# Altium PCB Main.PcbDoc (part 4 of 4)
Units mm, origin at the board's own origin, x right, y up, seen from the top; angles counter-clockwise.
Board outline 172.29 x 85.1 mm, 6 copper layers (Component Side, Ground Plane, Signal Layer 1, Signal Layer 2, Power Plane, Solder Side), stack 1.297 mm thick; 277 components, 256 nets, 1030 pads, 416 vias.
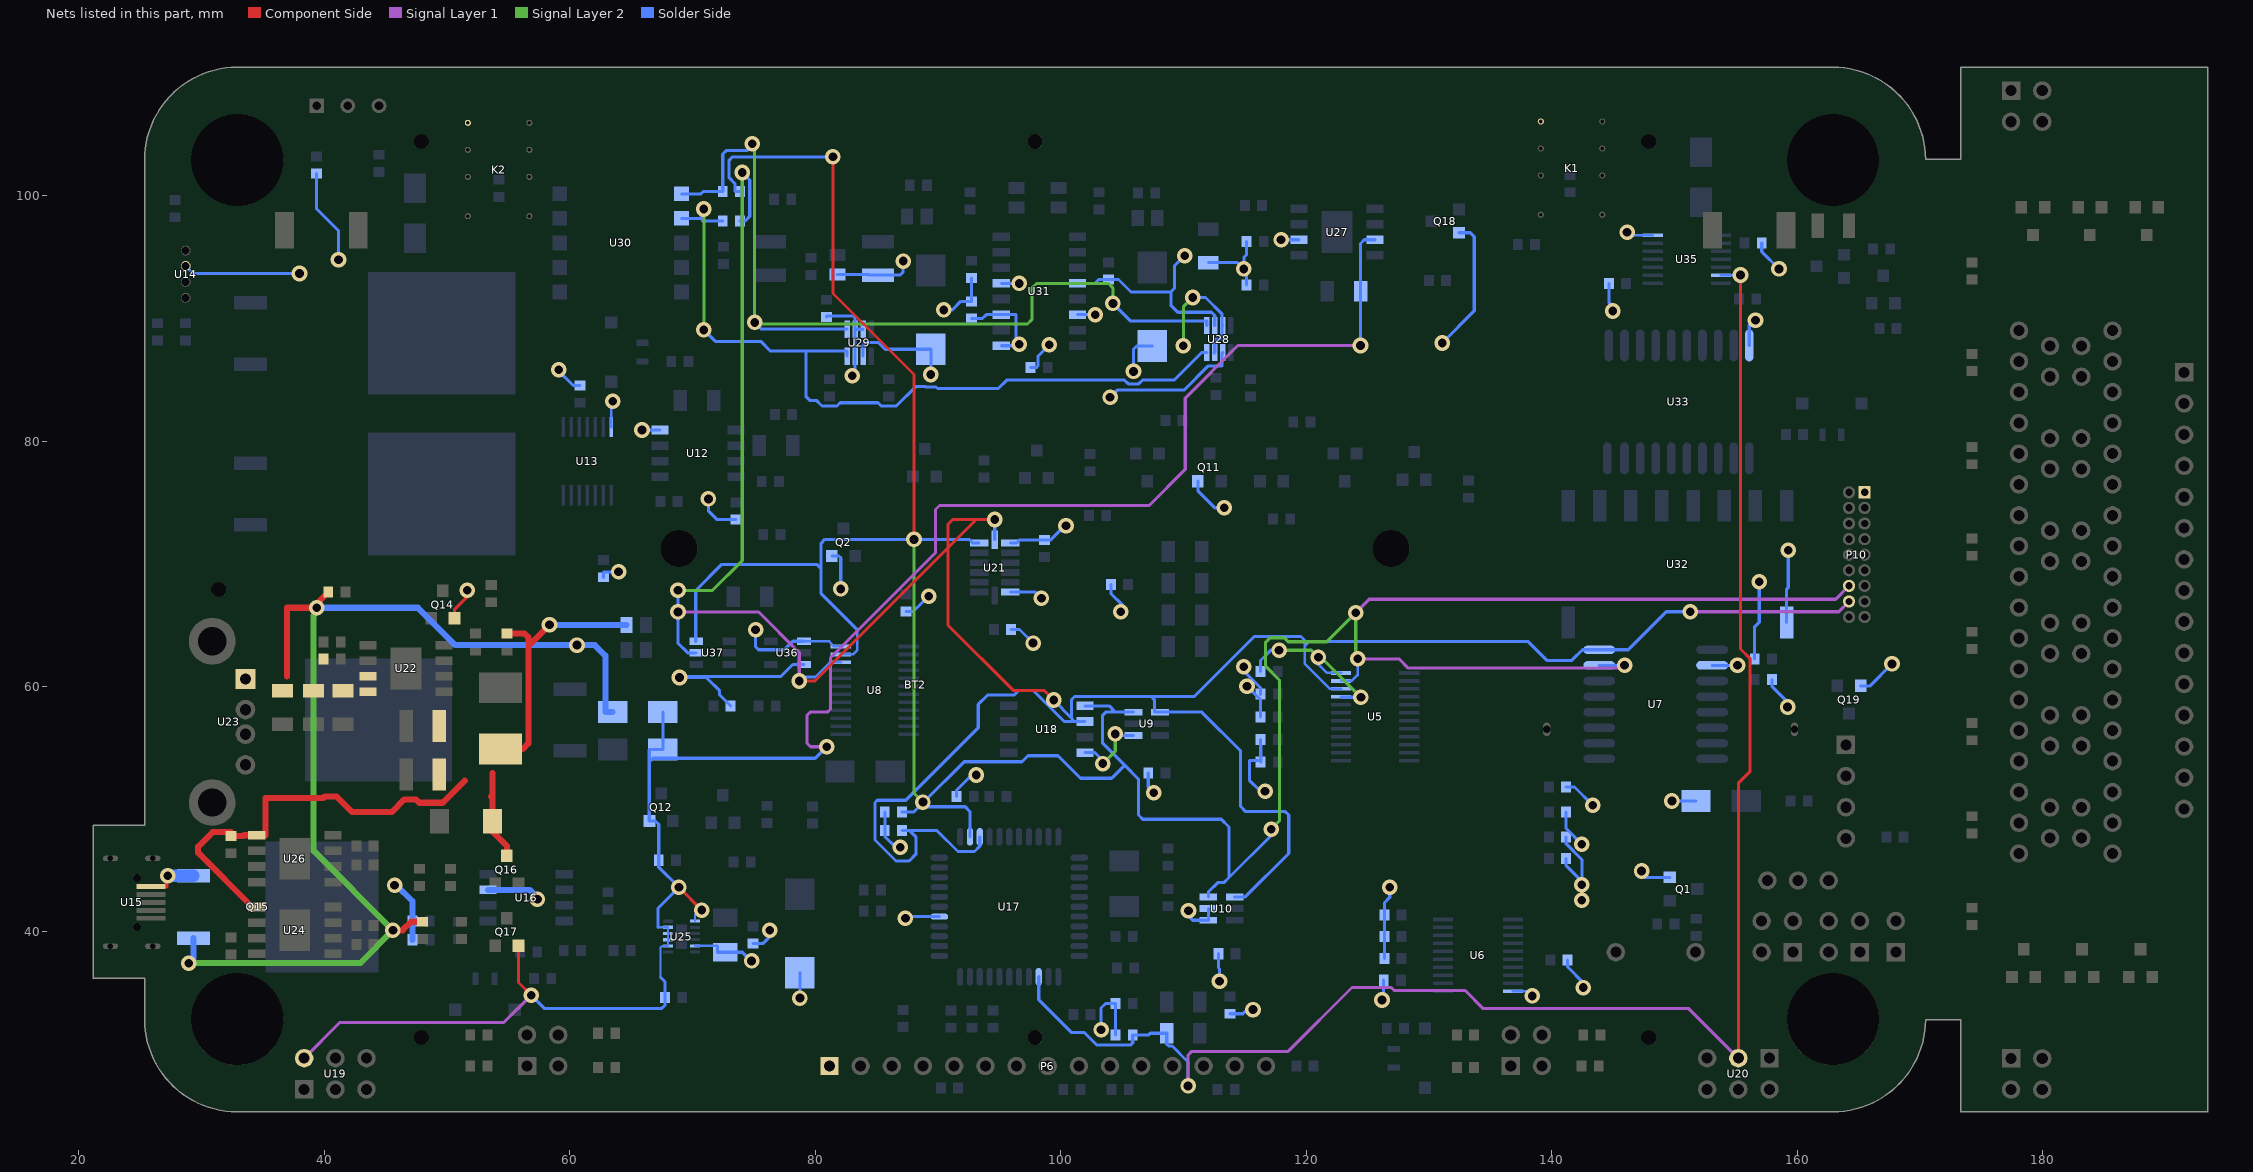
[diagram p8: the nets of this part, all layers, seen from the top]

## Via types
v1: diameter 1.27, hole 0.711, Component Side to Solder Side, tented both sides, 407 vias
v2: diameter 0.66, hole 0.33, Component Side to Solder Side, 8 vias
v3: diameter 1.27, hole 0.711, Component Side to Solder Side, 1 vias

## Nets (pads, with @x,y where several pads share a name; then routed paths per layer and width w, separated by ;. In a path a pad name is that pad's centre, name@x,y a point inside that pad or via, vN(x,y) a via of type N, cw(c..) or ccw(c..) an arc to the next point about the centre after c; other vN are vias at no path point) (continued)
SCL: L5.1 P10.16 R51.1 U5.22 U7.16 U8.22 U9.1 U10.1 U17.3 U18.6 U21.14 U37.5 | length 257.2
  Component Side w0.254: v1(78.689,60.452) 79.948,60.452 90.805,71.309 ; v1(94.615,73.609) 93.106,73.609 ; v1(99.416,58.903) 98.628,59.69 96.114,59.69 90.805,64.999 90.805,71.309 ; 90.805,71.309 93.106,73.609 ; 90.805,71.309 90.805,73.228 91.186,73.609 93.106,73.609
  Signal Layer 1 w0.254: v1(68.809,66.075) 75.377,66.075 78.689,62.763 v1(78.689,60.452) ; v1(151.282,66.091) 163.373,66.091 P10.16@164.211,66.929
  Signal Layer 2 w0.254: v1(68.809,67.832) 71.618,67.832 74.041,70.255 v1(74.041,101.879)
  Solder Side w0.21: 80.01,60.79 81.186,61.965 U8.22@82.061,61.965 ; 119.877,63.298 119.877,61.849 121.92,59.806 U5.22@122.828,59.806
  Solder Side w0.254: v1(68.809,67.832) v1(68.809,66.075) 68.809,63.525 69.596,62.738 U37.5@70.277,62.738 ; L5.1@73.852,97.917 74.27,97.917 74.651,98.298 74.651,101.27 v1(74.041,101.879) ; v1(78.689,60.452) 79.027,60.79 80.01,60.79 ; R51.1@87.06,48.26 87.681,48.26 ; U17.3@93.396,47.752 93.396,46.99 92.966,46.56 91.616,46.56 89.916,48.26 87.681,48.26 ; U21.14@94.615,71.966 v1(94.615,73.609) ; v1(99.416,58.903) 100.863,57.404 ; U18.6@101.958,57.15 101.117,57.15 ; U10.1@114.164,42.86 115.037,42.86 118.567,46.391 118.567,49.53 118.288,49.809 115.062,49.809 114.63,50.241 114.63,54.762 111.481,57.912 U9.1@108.068,57.912 107.62,57.912 107.62,58.928 107.366,59.182 ; v1(151.282,66.091) 149.327,66.091 146.228,62.992 U7.16@143.863,62.992 142.494,62.992 141.63,62.128 139.598,62.128 138.049,63.678 120.257,63.678 119.877,63.298 119.877,63.754 119.56,64.072 115.76,64.072 110.871,59.182 107.366,59.182 ; 87.681,48.26 88.189,47.752 88.189,46.337 87.641,45.789 86.57,45.789 84.861,47.498 84.861,50.546 85.054,50.738 87.371,50.738 93.269,56.636 93.269,58.548 94.033,59.312 96.204,59.312 96.582,59.69 97.728,59.69 100.268,57.15 101.117,57.15 ; 100.863,57.404 101.117,57.15 ; 100.863,57.404 100.863,58.928 101.117,59.182 107.366,59.182
SCL_IN: L5.2 U28.4 U29.4 U30.2 | length 66.1
  Signal Layer 2 w0.254: v1(70.917,89.052) v1(70.917,98.901)
  Solder Side w0.254: U30.2@69.088,98.139 70.612,98.139 ; v1(70.917,89.052) 71.852,88.117 75.551,88.117 76.343,87.325 79.248,87.325 ; v1(70.917,98.901) 70.917,98.444 70.612,98.139 ; L5.2@72.452,97.917 70.859,97.917 70.637,98.139 70.612,98.139 ; U29.4@82.591,86.911 82.591,87.325 79.248,87.325 ; 83.305,83.12 82.034,83.12 81.761,82.847 80.545,82.847 80.08,83.312 79.543,83.312 79.248,83.607 79.248,87.325 ; 83.305,83.12 85.098,83.12 85.371,82.847 86.587,82.847 88.169,84.43 88.958,84.43 88.987,84.4 89.829,84.4 89.952,84.277 94.909,84.277 95.595,84.963 105.188,84.963 105.497,84.654 106.339,84.654 106.648,84.963 109.22,84.963 111.465,87.208 U28.4@111.887,87.208
SDA: L4.1 P10.14 R52.1 U5.23 U7.15 U8.23 U9.6 U10.6 U17.2 U18.5 U21.13 U37.6 | length 266
  Component Side w0.254: v1(81.432,103.149) 81.432,92.024 88.036,85.42 v1(88.036,71.984)
  Signal Layer 1 w0.254: v1(124.028,66.015) 125.12,67.107 163.119,67.107 P10.14@164.211,68.199 ; v1(124.181,62.255) 127.553,62.255 128.315,61.493 145.696,61.493 v1(145.925,61.722)
  Signal Layer 2 w0.254: v1(88.036,71.984) 88.036,51.313 v1(88.766,50.584) ; v1(117.133,48.375) 117.805,49.047 117.805,60.528 116.688,61.646 116.688,63.602 117.054,63.968 118.201,63.968 118.523,63.646 121.66,63.646 v1(124.028,66.015) 124.028,62.408 v1(124.181,62.255)
  Solder Side w0.21: U8.23@82.061,62.615 83.058,62.615 83.417,62.974 83.417,64.614 ; U5.23@122.828,60.456 123.698,60.456 124.181,60.939 v1(124.181,62.255)
  Solder Side w0.254: U37.6@70.277,63.688 70.256,63.688 70.256,67.825 72.383,69.952 80.112,69.952 80.467,69.596 ; L4.1@73.852,100.33 73.444,100.33 73.444,100.978 72.974,101.448 72.974,102.87 73.254,103.149 v1(81.432,103.149) ; 83.417,64.614 80.467,67.564 80.467,69.596 ; R52.1@87.06,49.784 88.036,49.784 v1@88.801,50.549 ; v1(88.766,50.584) v1@88.801,50.549 ; U17.2@92.596,47.752 92.596,49.81 92.202,50.204 88.766,50.204 v1@88.801,50.549 ; U21.13@93.34,71.691 92.812,71.691 92.519,71.984 v1(88.036,71.984) 80.772,71.984 80.467,71.679 80.467,69.596 ; U18.5@101.958,58.42 103.937,58.42 104.445,57.912 ; U9.6@105.918,57.912 104.445,57.912 ; U10.6@112.014,42.86 112.014,43.256 112.776,44.018 113.284,44.018 113.701,44.436 ; v1(117.133,48.375) 117.133,47.867 113.701,44.436 ; U7.15@143.863,61.722 v1(145.925,61.722) ; v1@88.801,50.549 92.126,53.873 96.839,53.873 97.322,54.356 99.771,54.356 101.6,52.527 104.14,52.527 105.194,53.581 ; 104.445,57.912 103.657,57.912 103.403,57.658 103.403,55.372 105.194,53.581 ; 105.194,53.581 106.324,52.451 106.324,49.53 106.666,49.189 113.066,49.189 113.701,48.554 113.701,44.436
SDA_IN: L4.2 U28.5 U29.5 U30.1 | length 73.7
  Signal Layer 2 w0.254: v1(74.854,104.216) 75.057,104.013 v1(75.057,89.662) ; v1@75.184,89.535 97.282,89.535 97.638,89.891 97.638,92.456 98.019,92.837 103.886,92.837 104.242,92.481 v1(104.242,91.211)
  Solder Side w0.254: U30.1@69.088,100.139 70.663,100.139 70.854,100.33 L4.2@72.452,100.33 72.452,103.378 72.731,103.657 74.422,103.657 74.854,104.089 v1(74.854,104.216) ; v1(75.057,89.662) 75.59,89.129 82.591,89.129 U29.5@82.591,89.111 ; v1(104.242,91.211) 105.689,89.764 111.887,89.764 U28.5@111.887,89.408
SET: D12.2 R56.1 U17.25 U20.2 U35.6 | length 137.9
  Component Side w0.254: U20.2@155.194,29.718 155.194,52.121 156.159,53.086 156.159,62.263 155.372,63.05 v1(155.372,93.523)
  Signal Layer 1 w0.254: v1(110.363,27.457) 110.363,29.972 110.668,30.277 118.516,30.277 123.723,35.484 126.906,35.484 127.152,35.238 132.932,35.238 134.413,33.757 151.155,33.757 U20.2@155.194,29.718
  Solder Side w0.21: U35.6@153.778,93.513 155.362,93.513 v1(155.372,93.523)
  Solder Side w0.254: U17.25@98.196,36.352 98.196,34.493 100.888,31.801 101.93,31.801 102.946,30.785 105.664,30.785 105.856,30.977 R56.1@105.856,31.623 107.163,31.623 107.29,31.75 D12.2@108.632,31.75 108.632,30.861 108.784,30.709 109.067,30.709 110.363,29.412 v1(110.363,27.457)
SGND: C35.2 C36.1 R83.2 U28.3 U28.7 U29.3 U29.6 U29.7 U31.9 U31.11 | length 29.5
  Signal Layer 2 w0.254: v1(109.982,87.757) 109.982,90.932 v1(110.744,91.694)
  Solder Side w0.254: R83.2@80.899,90.105 80.899,90.195 83.089,90.195 83.241,90.043 U29.6@83.241,89.111 U29.6@83.241,89.103 ; v1(83.007,85.319) 83.007,85.644 83.241,85.877 U29.3@83.241,86.911 83.241,88.646 U29.6@83.241,89.103 ; U29.7@83.891,89.111 83.891,89.103 U29.6@83.241,89.103 ; C35.2@92.71,89.978 93.61,89.978 93.929,90.297 U31.11@95.15,90.297 96.358,90.297 96.358,88.138 v1(96.612,87.884) 96.485,87.757 U31.9@95.15,87.757 ; C36.1@97.533,85.979 98.009,85.979 98.136,86.106 98.136,86.92 v1(99.06,87.844) ; v1(110.744,91.694) 111.783,91.694 113.143,90.334 113.143,89.452 U28.7@113.187,89.408 113.143,89.364 113.143,88.327 112.711,88.327 112.537,88.153 U28.3@112.537,87.208 U28.3@112.493,87.164
VCC_5V: C12.2 C39.2 C40.2 D14.1 K1.3 K2.3 Q15.2 R65.2 R68.2 R72.2 U22.7 U22.8 U23.1 | length 91.7
  Component Side w0.49: U22.8@43.536,59.563 U22.8@43.557,59.563 ; U22.7@43.536,60.833 U22.7@43.557,60.833
  Component Side w0.5: 36.957,60.833 36.957,66.421 v1(39.37,66.421) 39.37,66.74 R68.2@40.321,67.691 ; v1(45.586,40.132) 46.359,40.132 47.059,40.832 R72.2@48.006,40.832
  Signal Layer 2 w0.5: v1(28.956,37.465) 42.919,37.465 v1(45.586,40.132) 39.116,46.602 39.116,65.786 39.37,66.04 v1(39.37,66.421)
  Solder Side w0.5: v1(28.956,37.465) 29.345,37.854 Q15.2@29.345,39.497 ; v1(39.37,66.421) 47.625,66.421 50.673,63.373 v1(60.579,63.373) 62.027,63.373 62.89,62.509 62.89,57.912 D14.1@63.482,57.912
VCC_BAT: BT2.1 C13.2 C15.2 C41.2 L1.1 Q16.1 R64.2 R80.2 U24.5 U26.5 | length 63.6
  Component Side w0.49: 29.718,46.457 34.138,42.037 U24.5@34.495,42.037 ; U26.5@34.495,47.879 35.204,47.879 35.204,49.784
  Component Side w0.5: 29.718,46.457 29.718,46.965 30.886,48.133 32.385,48.133 C15.2@32.385,47.817 33.401,47.817 33.463,47.879 U26.5@34.495,47.879 ; 35.204,49.784 35.204,50.927 39.918,50.927 40.041,51.05 40.985,51.05 42.247,49.788 45.51,49.788 46.518,50.796 47.462,50.796 47.732,50.526 49.637,50.526 51.435,52.324 ; 53.581,51.05 53.704,50.927 ; 53.704,52.942 53.704,50.927 ; L1.1@54.356,54.904 56.149,54.904 56.617,55.372 56.617,63.297 ; Q16.1@54.864,46.21 54.864,47.015 53.704,48.175 BT2.1@53.704,49.022 53.704,50.927 ; R64.2@54.864,64.327 56.298,64.327 56.617,64.008 56.617,63.297 ; v1(58.344,65.024) 56.617,63.297
  Solder Side w0.5: v1(58.344,65.024) R80.2@64.605,65.024
VCC_IN: C16.2 C21.2 D13.2 D14.2 Q12.3 Q17.3 R54.2 U19.6 U25.1 U25.8 U25.9 U25.10 U25.11 U27.3 | length 167.7
  Component Side w0.254: Q17.3@55.814,38.88 55.814,35.88 v1(56.845,34.849) ; v1(68.885,43.637) v1(70.739,41.783)
  Signal Layer 1 w0.254: U19.6@38.354,29.718 41.275,32.639 54.635,32.639 v1(56.845,34.849) ; v1(80.924,55.093) 79.604,55.093 79.324,55.372 79.324,57.658 79.578,57.912 80.975,57.912 81.229,58.166 81.229,62.332 89.789,70.891 89.789,74.422 90.119,74.752 107.188,74.752 110.134,77.699 110.134,83.496 114.421,87.782 v1(124.409,87.782)
  Solder Side w0.175: 67.183,40.386 U25.11@67.988,40.386 U25.8@67.988,38.862 67.513,38.862 67.386,38.735 67.386,36.322 ; U25.1@70.188,40.894 70.18,40.894 70.18,41.402 v1@70.536,41.758
  Solder Side w0.254: v1(56.845,34.849) 57.912,33.782 67.499,33.782 67.753,34.036 C16.2@67.753,34.671 67.753,35.955 67.386,36.322 ; 67.183,40.386 67.183,41.935 v1(68.885,43.637) 67.245,45.277 R54.2@67.245,45.847 67.245,48.768 66.973,49.04 Q12.3@66.487,49.04 ; D14.2@67.582,57.912 D13.2@67.582,54.864 66.472,54.864 66.472,49.04 Q12.3@66.487,49.04 ; v1@70.536,41.758 70.739,41.758 v1(70.739,41.783) ; v1(80.924,55.093) 79.985,54.153 66.792,54.153 66.487,53.848 Q12.3@66.487,49.04 ; v1(124.409,87.782) 124.413,87.786 C21.2@124.413,92.202 124.413,96.092 124.714,96.393 U27.3@125.603,96.393
VCC_MCU: C8.2 C11.2 C17.1 C18.2 D5.1 L2.2 P6.1 P10.1 Q1.3 Q2.3 Q11.3 Q14.3 Q18.3 Q19.3 R7.2 R8.2 R9.2 R10.2 R11.2 R12.2 R13.1 R14.1 R15.1 R16.1 R18.2 R19.2 R20.2 R21.2 R35.2 R37.2 R38.2 R39.2 R51.2 R52.2 R55.2 R56.2 R57.1 R61.2 R62.2 R87.2 R88.2 R89.2 R113.2 R114.2 R115.2 R116.2 R117.2 U5.21 U5.24 U6.20 U7.2 U8.24 U9.4 U10.4 U10.5 U12.8 U13.14 U14.2 U17.38 U18.8 U21.1 U21.6 U25.5 U32.9 U33.20 U35.14 U36.1 U36.3 | length 219.5
  Component Side w0.254: Q14.3@50.607,65.55 50.607,66.295 51.638,67.326 v1(51.638,67.846)
  Signal Layer 1 w0.254: v1(120.987,62.376) v1@121.059,62.304
  Signal Layer 2 w0.254: v1(103.42,53.721) 104.431,54.732 v1(104.431,56.139) ; v1(117.78,62.952) 120.411,62.952 v1(120.987,62.376) 121.195,62.376 v1(124.446,59.125) 124.238,59.125 v1@124.207,59.156
  Solder Side w0.175: U25.5@70.188,38.874 L2.2@72.034,38.874
  Solder Side w0.21: U13.14@63.362,81.134 v1@63.362,83.155 ; U36.1@79.075,63.688 81.111,63.688 81.534,63.265 U8.24@82.061,63.265 ; v1(120.987,62.376) 120.987,61.785 121.666,61.106 U5.24@122.828,61.106 ; U6.20@136.835,35.175 138.143,35.175 v1@138.524,34.794 ; v1@146.271,96.763 U35.14@148.228,96.763
  Solder Side w0.254: U14.2@28.702,94.264 29.316,93.65 v1(37.973,93.65) ; R35.2@39.37,101.789 39.37,98.908 41.148,97.13 v1(41.148,94.767) ; v1(59.095,85.801) 58.982,85.801 60.263,84.52 R38.2@60.833,84.52 ; R37.2@62.738,68.896 62.738,69.342 v1(63.968,69.342) ; v1@63.362,83.155 63.436,83.229 v1(63.489,83.229) ; v1(65.875,80.899) U12.8@67.337,80.899 ; v1(71.287,75.286) 71.287,74.313 72.005,73.595 R39.2@73.533,73.595 ; L2.2@72.034,38.874 72.034,38.351 L2.2@72.644,38.351 74.05,38.351 74.758,37.643 v1(74.805,37.643) ; R89.2@73.09,58.42 72.198,59.312 72.198,59.646 71.113,60.731 v1(68.931,60.731) 69.015,60.815 77.193,60.815 78.166,61.788 U36.3@79.075,61.788 ; C18.2@74.93,39.051 75.714,39.051 76.287,39.624 v1(76.287,40.132) ; v1(75.128,64.618) 75.128,63.246 75.382,62.992 77.469,62.992 78.165,63.688 U36.1@79.075,63.688 ; v1(78.74,34.616) C17.1@78.74,36.678 ; Q2.3@81.346,70.63 81.922,70.63 82.067,70.485 v1(82.067,67.953) ; R52.2@85.66,49.784 R51.2@85.66,48.26 85.66,47.781 86.538,46.903 v1(86.919,46.903) ; v1(87.339,41.125) 87.72,41.125 87.847,41.252 U17.38@90.096,41.252 ; R61.2@87.376,66.102 87.957,66.102 89.216,67.361 v1(89.241,67.361) ; C8.2@91.502,51.054 91.502,51.559 92.735,52.792 v1(93.116,52.792) ; U21.6@95.89,67.691 97.91,67.691 v1(98.418,67.183) ; U21.1@95.89,71.691 96.393,71.691 96.649,71.947 C11.2@98.679,71.947 99.176,71.947 100.33,73.101 v1(100.417,73.101) ; R62.2@95.95,64.643 96.636,64.643 v1(97.739,63.54) ; U18.8@101.958,54.61 102.785,54.61 103.42,53.975 v1(103.42,53.721) ; v1(103.276,32.044) 103.276,33.807 103.632,34.163 R57.1@104.456,34.163 104.456,32.824 R56.2@104.456,31.623 ; R11.2@104.075,68.326 104.075,67.58 105.004,66.652 105.004,66.207 v1(104.877,66.08) ; v1(104.431,56.139) 104.431,56.102 104.521,56.012 U9.4@105.918,56.012 ; R20.2@107.123,52.959 107.123,51.794 v1(107.569,51.348) ; v1(110.4,41.722) 110.4,41.304 110.744,40.96 U10.4@112.014,40.96 U10.5@112.014,41.91 ; Q11.3@111.161,76.726 111.161,75.944 112.547,74.557 v1(113.309,74.557) ; R21.2@112.838,38.227 112.838,37.062 112.928,36.972 v1(112.928,35.981) ; R55.2@113.792,33.336 114.83,33.336 115.174,33.68 v1(115.657,33.68) ; v1(114.91,61.619) 114.91,61.261 116.267,59.904 R114.2@116.267,59.372 ; v1(115.164,60.031) 116.267,58.928 R115.2@116.267,57.531 ; R117.2@116.267,53.848 116.281,53.848 R117.2@116.281,53.972 ; R113.2@116.267,61.214 116.267,62.114 117.105,62.952 v1(117.78,62.952) ; v1(116.637,51.462) 116.267,51.462 115.359,52.37 115.359,53.972 R117.2@116.281,53.972 ; U5.21@122.828,59.156 122.859,59.125 v1(124.446,59.125) ; v1(126.162,34.457) 126.3,34.595 R13.1@126.3,36.068 ; R14.1@126.362,37.846 R7.2@126.362,39.624 R16.1@126.362,41.402 126.362,42.395 126.797,42.83 v1(126.797,43.648) ; v1(131.064,87.986) 133.68,90.602 133.68,96.637 133.35,96.967 Q18.3@132.443,96.967 ; v1(138.397,34.794) v1@138.524,34.794 ; R9.2@141.162,45.974 141.162,45.404 v1@142.443,44.123 ; R15.1@141.162,47.752 141.162,47.182 142.443,45.901 v1@142.443,44.123 ; R8.2@141.162,49.784 141.162,48.438 v1(142.443,47.157) ; R10.2@141.162,51.816 141.848,51.816 v1(143.332,50.332) ; R12.2@141.289,37.719 141.289,37.149 142.57,35.868 v1(142.57,35.473) ; v1(142.443,42.585) v1@142.443,44.123 ; v1(142.443,43.855) v1@142.443,44.123 ; R87.2@144.65,92.837 144.65,91.309 145.368,90.591 v1(144.958,90.591) ; v1(146.133,97.017) 146.133,96.901 v1@146.271,96.763 ; v1(147.31,44.973) 147.31,44.704 147.564,44.45 Q1.3@149.606,44.45 ; v1(149.785,50.673) D5.1@151.747,50.673 ; U7.2@153.063,61.722 v1(155.125,61.722) ; U33.20@156.083,87.785 156.083,89.466 156.464,89.847 v1(156.591,89.847) ; R19.2@156.526,62.23 156.526,64.868 156.896,65.238 v1(156.896,68.54) ; R88.2@157.102,96.139 157.102,95.428 v1(158.51,94.02) ; R18.2@157.926,60.579 157.926,60.009 159.207,58.728 v1(159.207,58.333) ; U32.9@159.131,65.227 159.131,67.924 159.258,68.051 v1(159.258,71.099) ; Q19.3@165.161,60.053 165.928,60.053 v1(167.716,61.841) ; R117.2@116.281,53.972 116.281,54.889 ; 116.281,54.889 116.267,54.904 R116.2@116.267,55.689 116.281,54.889
VCC_RADIO: C20.2 C22.2 C27.2 C31.1 C32.1 C33.1 C34.1 C35.1 L7.1 R47.2 U27.6 U28.2 U28.6 U29.2 U31.4 U31.6 U31.13 | length 63
  Solder Side w0.254: L7.1@81.788,93.561 84.328,93.561 84.328,93.519 C27.2@85.09,93.519 86.898,93.519 87.152,93.773 v1(87.152,94.662) ; U29.2@83.891,86.911 83.891,87.884 84.018,88.011 85.166,88.011 85.699,87.478 C31.1@89.408,87.478 v1(89.408,85.416) ; v1(90.464,90.678) 91.15,90.678 91.85,91.378 C35.1@92.71,91.378 C32.1@92.71,93.28 ; U31.13@95.15,92.837 v1(96.612,92.837) ; U31.6@101.35,90.297 v1(102.812,90.297) ; U31.4@101.35,92.837 102.768,92.837 103.084,93.153 C34.1@103.886,93.153 104.695,93.153 105.711,92.137 108.966,92.137 ; v1(104.013,83.566) 104.593,84.146 110.033,84.146 112.014,86.127 113.143,86.127 113.143,87.164 U28.2@113.187,87.208 ; v1(105.918,85.67) 105.918,87.478 106.172,87.732 C33.1@107.442,87.732 ; v1(110.095,95.098) 109.253,94.256 109.253,92.424 108.966,92.137 ; C22.2@112.014,94.535 114.394,94.535 v1(114.91,94.02) ; U28.6@112.537,89.408 112.537,90.222 112.27,90.489 109.536,90.489 108.966,91.059 108.966,92.137 ; C20.2@115.124,92.71 115.124,93.806 v1(114.91,94.02) ; R47.2@115.124,96.266 115.124,95.163 114.91,94.949 v1(114.91,94.02) ; v1(117.941,96.393) U27.6@119.403,96.393
VCC_USB: C5.2 C7.2 Q15.3 U15.1 U16.7 | length 12.6
  Component Side w0.3: 27.132,43.688 v1@27.132,44.476
  Component Side w0.5: v1@27.132,44.476 v1(27.233,44.577)
  Solder Side w0.49: U16.7@53.34,43.434 56.721,43.434
  Solder Side w0.5: v1(45.72,43.815) 45.873,43.815 47.179,42.509 C5.2@47.179,40.894 C7.2@47.179,39.37 ; 56.721,43.434 57.356,42.799 v1(57.356,42.672)
  Solder Side w1: v1(27.233,44.577) Q15.3@29.345,44.577
pads on no net: BT2.0 P10.17 R31.3 R32.3 S1.1 U1.0 U2.0 U3.0 U4.0 U6.12 U7.4 U8.1 U15.0 U15.4 U17.26 U17.27 U17.29 U19.3 U19.4 U20.3 U20.4 U20.5 U20.6 U21.3 U21.9 U21.10 U21.11 U25.6 U25.7 U26.6 U26.7 U27.1 U27.4 U27.5 U30.4 U30.9 U33.10 U33.11 U36.4
copper on no net:
  other v3: 46.736,69.596

## Polygon pours and split planes (outlines as drawn)
GND on Signal Layer 1 "Sig1-GND" (solid, pour order 4): 25.35,32.9 25.35,36.224 21.209,36.224 cw(c21.209,36.274) 21.159,36.274 21.159,48.641 cw(c21.209,48.641) 21.209,48.691 25.35,48.691 25.35,102.9 cw(c32.9,102.9) 32.9,110.45 162.9,110.45 cw(c162.9,102.9) 170.45,102.95 173.305,102.95 173.305,110.4 cw(c173.355,110.4) 173.355,110.45 193.4,110.45 cw(c193.4,110.4) 193.45,110.4 193.45,25.4 cw(c193.4,25.4) 193.4,25.35 173.355,25.35 cw(c173.355,25.4) 173.305,25.4 173.305,32.85 170.45,32.85 cw(c162.9,32.9) 162.9,25.35 32.9,25.35 cw(c32.9,32.9)
GND on Signal Layer 2 "Sig2-GND" (solid, pour order 5): 25.35,32.9 25.35,36.224 21.209,36.224 cw(c21.209,36.274) 21.159,36.274 21.159,48.641 cw(c21.209,48.641) 21.209,48.691 25.35,48.691 25.35,102.9 cw(c32.9,102.9) 32.9,110.45 162.9,110.45 cw(c162.9,102.9) 170.45,102.95 173.305,102.95 173.305,110.4 cw(c173.355,110.4) 173.355,110.45 193.4,110.45 cw(c193.4,110.4) 193.45,110.4 193.45,25.4 cw(c193.4,25.4) 193.4,25.35 173.355,25.35 cw(c173.355,25.4) 173.305,25.4 173.305,32.85 170.45,32.85 cw(c162.9,32.9) 162.9,25.35 32.9,25.35 cw(c32.9,32.9)
GND on Ground Plane (split plane): 172.794,102.247 172.533,102.358 172.532,102.359 172.531,102.359 172.484,102.374 172.438,102.388 172.436,102.388 172.435,102.389 172.183,102.44 172.794,102.44
GND on Ground Plane (split plane): 172.794,86.224 172.534,86.335 172.533,86.336 172.532,86.336 172.485,86.351 172.439,86.365 172.437,86.365 172.436,86.366 172.135,86.427 172.133,86.427 172.132,86.428 172.084,86.433 172.035,86.438 172.034,86.438 172.033,86.438 171.725,86.438 171.724,86.438 171.723,86.438 171.674,86.433 171.625,86.428 171.624,86.428 171.623,86.428 171.321,86.367 171.32,86.366 171.319,86.366 171.272,86.352 171.226,86.337 171.225,86.337 171.224,86.336 170.961,86.225 170.961,87.528 171.224,87.417 171.225,87.416 171.226,87.416 171.272,87.401 171.319,87.387 171.32,87.387 171.321,87.386 171.623,87.325 171.624,87.325 171.625,87.325 171.674,87.32 171.723,87.315 171.724,87.315 171.725,87.315 172.033,87.315 172.034,87.315 172.035,87.315 172.084,87.32 172.132,87.325 172.133,87.326 172.135,87.326 172.436,87.387 172.437,87.388 172.439,87.388 172.485,87.402 172.532,87.417 172.533,87.417 172.534,87.418 172.794,87.529
GND on Ground Plane (split plane): 171.32,102.389 171.319,102.388 171.317,102.388 171.271,102.374 171.224,102.359 171.223,102.359 171.222,102.358 170.961,102.247 170.961,102.44 171.572,102.44
GND on Ground Plane (split plane): 192.94,25.86 173.815,25.86 173.815,32.578 173.83,32.596 173.872,32.674 173.877,32.684 173.891,32.729 173.906,32.78 173.907,32.791 173.916,32.879 173.916,32.9 173.916,102.9 173.916,102.921 173.906,103.02 173.877,103.116 173.83,103.204 173.815,103.222 173.815,109.94 192.94,109.94
GND on Ground Plane (split plane): 172.794,49.7 172.564,49.805 172.56,49.807 172.556,49.809 172.512,49.823 172.469,49.838 172.465,49.839 172.46,49.84 172.148,49.908 172.143,49.909 172.139,49.91 172.094,49.915 172.049,49.92 172.044,49.92 172.039,49.92 171.719,49.921 171.715,49.92 171.71,49.921 171.665,49.915 171.62,49.911 171.615,49.91 171.611,49.909 171.298,49.841 171.294,49.84 171.289,49.839 171.246,49.825 171.203,49.811 171.199,49.809 171.194,49.807 170.961,49.701 170.961,51.1 171.194,50.994 171.199,50.992 171.203,50.99 171.246,50.976 171.289,50.962 171.294,50.961 171.298,50.96 171.611,50.892 171.615,50.891 171.62,50.89 171.665,50.886 171.71,50.88 171.715,50.881 171.719,50.88 172.039,50.881 172.044,50.881 172.049,50.881 172.094,50.886 172.139,50.891 172.143,50.892 172.148,50.893 172.46,50.961 172.465,50.962 172.469,50.963 172.512,50.978 172.556,50.992 172.56,50.994 172.564,50.996 172.794,51.101
GND on Ground Plane (split plane): 172.794,67.2 172.564,67.306 172.559,67.307 172.555,67.31 172.512,67.324 172.469,67.338 172.465,67.339 172.46,67.34 172.148,67.409 172.143,67.409 172.139,67.411 172.094,67.415 172.048,67.421 172.044,67.42 172.039,67.421 171.719,67.421 171.715,67.421 171.71,67.421 171.665,67.416 171.62,67.411 171.615,67.41 171.611,67.409 171.298,67.342 171.294,67.34 171.289,67.34 171.246,67.325 171.203,67.311 171.199,67.309 171.195,67.308 170.961,67.201 170.961,68.599 171.194,68.493 171.199,68.491 171.203,68.489 171.246,68.475 171.289,68.461 171.294,68.46 171.298,68.459 171.611,68.391 171.615,68.39 171.62,68.389 171.665,68.385 171.71,68.379 171.715,68.38 171.719,68.379 172.039,68.38 172.044,68.38 172.049,68.38 172.094,68.385 172.139,68.39 172.143,68.391 172.148,68.392 172.46,68.46 172.465,68.461 172.469,68.462 172.512,68.477 172.556,68.491 172.56,68.493 172.564,68.495 172.794,68.6
no net on Ground Plane (split plane): 162.771,107.537 162.771,109.94
PGND on Ground Plane (split plane): 137.793,95.504 137.793,91.621 137.106,90.934 58.093,90.934 58.041,90.986 58.041,94.937 58.074,94.904 58.116,94.876 58.166,94.867 58.216,94.876 58.258,94.904 58.286,94.946 58.295,94.996 58.286,95.046 58.258,95.088 58.041,95.304 58.041,101.598 137.793,101.598
SGND on Ground Plane (split plane): 115.568,83.493 114.627,82.552 80.445,82.552 79.885,83.112 79.885,90.676 115.568,90.676
GND on Ground Plane (split plane): 183 vertices, not listed, extent 25.775,25.86 169.938,109.94
GND on Ground Plane (split plane): 172.794,33.36 170.961,33.36 170.961,33.579 170.962,33.578 170.968,33.575 170.973,33.572 171.013,33.554 171.052,33.536 171.059,33.535 171.065,33.532 171.38,33.431 171.387,33.429 171.393,33.427 171.435,33.419 171.478,33.41 171.484,33.41 171.491,33.408 171.821,33.379 171.827,33.379 171.834,33.378 171.877,33.38 171.921,33.38 171.927,33.382 171.934,33.382 172.262,33.426 172.268,33.428 172.275,33.428 172.317,33.439 172.359,33.449 172.365,33.452 172.371,33.454 172.681,33.569 172.687,33.572 172.694,33.574 172.732,33.594 172.771,33.613 172.777,33.617 172.782,33.62 172.794,33.628
POWER_GND on Ground Plane (split plane): 49.796,107.3 49.806,107.251 49.834,107.209 49.876,107.18 49.926,107.171 150.874,107.171 150.874,103.94 150.784,103.851 150.756,103.809 150.747,103.759 150.756,103.709 150.784,103.667 150.826,103.639 150.874,103.63 150.874,102.289 150.441,101.856 33.782,101.856 33.732,101.847 33.69,101.819 31.023,99.152 30.995,99.11 30.986,99.06 30.986,67.183 30.995,67.133 31.023,67.091 31.065,67.063 31.115,67.054 60.525,67.054 61.085,66.494 61.085,65.024 61.085,48.768 61.085,48.46 61.085,41.964 60.779,41.658 51.435,41.658 51.385,41.649 51.343,41.621 50.581,40.859 50.553,40.817 50.544,40.767 50.544,37.011 50.296,36.764 24.798,36.764 24.749,36.754 24.719,36.734 21.669,36.734 21.669,48.181 25.35,48.181 25.449,48.191 25.545,48.22 25.633,48.267 25.711,48.33 25.774,48.408 25.821,48.496 25.85,48.592 25.86,48.691 25.86,102.9 25.86,103.246 25.928,103.934 26.063,104.613 26.264,105.275 26.528,105.914 26.854,106.524 27.239,107.099 27.677,107.633 28.167,108.123 28.701,108.561 29.276,108.946 29.886,109.272 30.525,109.536 31.187,109.737 31.866,109.872 32.554,109.94 49.796,109.94
no net on Power Plane (split plane): 172.794,102.247 172.533,102.358 172.532,102.359 172.531,102.359 172.484,102.374 172.438,102.388 172.436,102.388 172.435,102.389 172.183,102.44 172.794,102.44
no net on Power Plane (split plane): 172.794,67.2 172.564,67.306 172.559,67.307 172.555,67.31 172.512,67.324 172.469,67.338 172.465,67.339 172.46,67.34 172.148,67.409 172.143,67.409 172.139,67.411 172.094,67.415 172.048,67.421 172.044,67.42 172.039,67.421 171.719,67.421 171.715,67.421 171.71,67.421 171.665,67.416 171.62,67.411 171.615,67.41 171.611,67.409 171.298,67.342 171.294,67.34 171.289,67.34 171.246,67.325 171.203,67.311 171.199,67.309 171.195,67.308 170.961,67.201 170.961,68.599 171.194,68.493 171.199,68.491 171.203,68.489 171.246,68.475 171.289,68.461 171.294,68.46 171.298,68.459 171.611,68.391 171.615,68.39 171.62,68.389 171.665,68.385 171.71,68.379 171.715,68.38 171.719,68.379 172.039,68.38 172.044,68.38 172.049,68.38 172.094,68.385 172.139,68.39 172.143,68.391 172.148,68.392 172.46,68.46 172.465,68.461 172.469,68.462 172.512,68.477 172.556,68.491 172.56,68.493 172.564,68.495 172.794,68.6
no net on Power Plane (split plane): 171.32,102.389 171.319,102.388 171.317,102.388 171.271,102.374 171.224,102.359 171.223,102.359 171.222,102.358 170.961,102.247 170.961,102.44 171.572,102.44
no net on Power Plane (split plane): 192.94,25.86 173.815,25.86 173.815,32.578 173.83,32.596 173.872,32.674 173.877,32.684 173.891,32.729 173.906,32.78 173.907,32.791 173.916,32.879 173.916,32.9 173.916,102.9 173.916,102.921 173.906,103.02 173.877,103.116 173.83,103.204 173.815,103.222 173.815,109.94 192.94,109.94
no net on Power Plane (split plane): 172.794,33.36 170.961,33.36 170.961,33.579 170.962,33.578 170.968,33.575 170.973,33.572 171.013,33.554 171.052,33.536 171.059,33.535 171.065,33.532 171.38,33.431 171.387,33.429 171.393,33.427 171.435,33.419 171.478,33.41 171.484,33.41 171.491,33.408 171.821,33.379 171.827,33.379 171.834,33.378 171.877,33.38 171.921,33.38 171.927,33.382 171.934,33.382 172.262,33.426 172.268,33.428 172.275,33.428 172.317,33.439 172.359,33.449 172.365,33.452 172.371,33.454 172.681,33.569 172.687,33.572 172.694,33.574 172.732,33.594 172.771,33.613 172.777,33.617 172.782,33.62 172.794,33.628
no net on Power Plane (split plane): 172.794,49.7 172.564,49.805 172.56,49.807 172.556,49.809 172.512,49.823 172.469,49.838 172.465,49.839 172.46,49.84 172.148,49.908 172.143,49.909 172.139,49.91 172.094,49.915 172.049,49.92 172.044,49.92 172.039,49.92 171.719,49.921 171.715,49.92 171.71,49.921 171.665,49.915 171.62,49.911 171.615,49.91 171.611,49.909 171.298,49.841 171.294,49.84 171.289,49.839 171.246,49.825 171.203,49.811 171.199,49.809 171.194,49.807 170.961,49.701 170.961,51.1 171.194,50.994 171.199,50.992 171.203,50.99 171.246,50.976 171.289,50.962 171.294,50.961 171.298,50.96 171.611,50.892 171.615,50.891 171.62,50.89 171.665,50.886 171.71,50.88 171.715,50.881 171.719,50.88 172.039,50.881 172.044,50.881 172.049,50.881 172.094,50.886 172.139,50.891 172.143,50.892 172.148,50.893 172.46,50.961 172.465,50.962 172.469,50.963 172.512,50.978 172.556,50.992 172.56,50.994 172.564,50.996 172.794,51.101
VCC_5V on Power Plane (split plane): 49.911,107.315 150.874,107.315 150.874,104.194 148.409,101.729 33.836,101.729 33.809,101.724 33.782,101.729 33.732,101.72 33.69,101.692 30.896,98.898 30.868,98.856 30.859,98.806 30.859,97.282 30.859,97.028 30.859,77.47 30.859,67.31 30.868,67.26 30.896,67.218 30.938,67.19 30.988,67.181 38.046,67.181 38.262,66.964 38.304,66.936 38.354,66.927 60.652,66.927 61.212,66.367 61.212,62.486 38.229,62.486 38.229,65.786 38.22,65.836 38.192,65.878 38.15,65.906 38.1,65.915 25.86,65.915 25.86,102.9 25.86,103.246 25.928,103.934 26.063,104.613 26.264,105.275 26.528,105.914 26.854,106.524 27.239,107.099 27.677,107.633 28.167,108.123 28.701,108.561 29.276,108.946 29.886,109.272 30.525,109.536 31.187,109.737 31.866,109.872 32.554,109.94 49.911,109.94
no net on Power Plane (split plane): 172.794,86.224 172.534,86.335 172.533,86.336 172.532,86.336 172.485,86.351 172.439,86.365 172.437,86.365 172.436,86.366 172.135,86.427 172.133,86.427 172.132,86.428 172.084,86.433 172.035,86.438 172.034,86.438 172.033,86.438 171.725,86.438 171.724,86.438 171.723,86.438 171.674,86.433 171.625,86.428 171.624,86.428 171.623,86.428 171.321,86.367 171.32,86.366 171.319,86.366 171.272,86.352 171.226,86.337 171.225,86.337 171.224,86.336 170.961,86.225 170.961,87.528 171.224,87.417 171.225,87.416 171.226,87.416 171.272,87.401 171.319,87.387 171.32,87.387 171.321,87.386 171.623,87.325 171.624,87.325 171.625,87.325 171.674,87.32 171.723,87.315 171.724,87.315 171.725,87.315 172.033,87.315 172.034,87.315 172.035,87.315 172.084,87.32 172.132,87.325 172.133,87.326 172.135,87.326 172.436,87.387 172.437,87.388 172.439,87.388 172.485,87.402 172.532,87.417 172.533,87.417 172.534,87.418 172.794,87.529
VCC_RADIO on Power Plane (split plane): 137.576,101.438 137.548,101.396 137.539,101.346 137.539,91.621 136.725,90.807 115.697,90.807 115.647,90.798 115.605,90.77 115.577,90.728 115.568,90.678 115.577,90.628 115.605,90.586 115.695,90.497 115.695,83.62 114.589,82.515 114.561,82.473 114.552,82.425 80.699,82.425 80.012,83.112 80.012,90.297 80.003,90.347 79.975,90.389 79.721,90.643 79.679,90.671 79.629,90.68 58.347,90.68 57.914,91.113 57.914,101.471 137.609,101.471
VCC_MCU on Power Plane (split plane): 235 vertices, not listed, extent 25.765,25.86 169.938,109.94
VCC_IN on Power Plane (split plane): 125.093,57.712 123.898,56.517 68.961,56.517 68.911,56.508 68.869,56.48 68.361,55.972 68.333,55.93 68.324,55.88 68.324,49.713 68.324,38.027 67.891,37.594 54.483,37.594 54.433,37.585 54.391,37.557 53.883,37.049 53.855,37.007 53.846,36.957 53.846,34.471 52.651,33.276 51.108,33.276 50.929,33.455 50.929,35.687 50.929,40.84 51.489,41.4 64.77,41.4 64.82,41.409 64.862,41.437 65.624,42.199 65.652,42.241 65.661,42.291 65.661,52.451 65.661,52.832 65.661,59.666 65.845,59.849 113.826,59.849 113.876,59.859 113.89,59.868 120.704,59.868 120.753,59.878 120.795,59.906 121.25,60.36 121.278,60.402 121.287,60.452 121.287,85.723 125.093,85.723
VCC_USB on Power Plane (split plane): 37.971,62.357 37.98,62.307 38.008,62.265 38.05,62.237 38.1,62.228 61.212,62.228 61.212,48.641 61.212,48.514 61.212,41.71 61.16,41.658 51.435,41.658 51.385,41.649 51.343,41.621 50.708,40.986 50.68,40.944 50.671,40.894 50.671,37.338 50.671,37.248 50.2,36.778 25.633,36.778 25.584,36.768 25.542,36.74 25.518,36.704 25.449,36.724 25.35,36.734 21.669,36.734 21.669,48.181 25.35,48.181 25.449,48.191 25.545,48.22 25.633,48.267 25.711,48.33 25.774,48.408 25.821,48.496 25.85,48.592 25.86,48.691 25.86,65.657 37.971,65.657

## Keep-outs
Keep-Out Layer:
  lines w0.1: 25.4,36.226 25.4,32.9 ccw(c32.9,32.9) 32.9,25.4 162.9,25.4 ccw(c162.9,32.9) 170.4,32.9 ; 25.4,36.274 21.209,36.274 21.209,48.641 25.4,48.641 25.4,102.9 cw(c32.9,102.9) 32.9,110.4 162.9,110.4 cw(c162.9,102.9) 170.4,102.9 ; 57.785,99.187 60.579,99.187 ; 170.399,84.399 cw(c171.877,84.399) 173.355,84.399 ; 170.399,89.354 ccw(c171.877,89.354) 173.355,89.354 ; 170.4,35.378 ccw(c171.831,35.378) 173.262,35.378 ; 170.4,100.422 cw(c171.877,100.422) 173.355,100.422 ; 170.44,47.923 cw(c171.877,47.923) 173.314,47.923 ; 170.44,52.878 ccw(c171.877,52.878) 173.314,52.878 ; 170.44,65.423 cw(c171.877,65.423) 173.314,65.423 ; 170.44,70.377 ccw(c171.877,70.377) 173.314,70.377 ; 170.4,32.9 173.355,32.9 ; 170.4,32.9 170.4,102.9 ; 170.4,102.9 173.355,102.9 ; 173.355,32.9 173.355,25.4 193.4,25.4 193.4,110.4 173.355,110.4 173.355,102.9 ; 173.355,32.9 173.355,102.9
  lines w0.254: 49.911,110.4 49.911,107.315 57.785,107.315 57.785,99.187 ; 60.579,99.187 60.579,107.315 60.706,107.315 162.732,107.315 162.9,107.483 162.9,110.4 ; 173.355,25.654 173.609,25.4

## Other copper
Component Side:
  rectangle net POWER_GND: 37.846,46.228 41.402,46.99
  rectangle net POWER_GND: 37.211,40.386 41.402,41.148
  rectangle net POWER_GND: 37.846,43.688 41.402,44.45
  rectangle net POWER_GND: 36.322,39.624 38.862,47.625
  rectangle net POWER_GND: 35.687,56.261 47.244,57.531
  rectangle net POWER_GND: 45.339,51.562 48.006,63.246
  rectangle net VCC_BAT: 52.578,48.006 56.134,56.134
  rectangle net VCC_BAT: 48.768,51.562 49.911,58.039
  rectangle net VCC_BAT: 48.768,51.562 52.832,56.134
  rectangle net NetL1_2: 48.768,58.674 56.007,61.214
  rectangle net VCC_5V: 35.687,59.055 44.323,61.214
  rectangle net POWER_GND: 35.687,51.562 47.879,57.531
  rectangle net VCC_5V: 39.497,60.833 40.386,62.738
  rectangle net NetR65_1: 40.894,61.722 44.323,62.738
  rectangle net GND: 42.799,62.992 44.323,65.532
  rectangle net GND: 39.497,64.389 42.799,65.532
  rectangle net GND: 39.497,63.119 40.386,65.532
  rectangle net VCC_5V: 32.512,59.436 39.497,61.595
  rectangle net NetR65_1: 40.894,62.484 41.783,64.135
Solder Side:
  rectangle net POWER_GND: 45.339,62.103 48.006,63.246
  rectangle net ANT: 58.674,99.695 59.69,109.601
  rectangle net ANT: 58.674,108.966 159.639,109.982
Ground Plane (plane layer: these items are gaps in the copper):
  pour cut-out: 49.926,110.871 162.771,110.871 162.771,107.392 49.926,107.392
  lines w0.254: 24.798,36.634 44.254,36.634 ; 25.35,83.185 25.477,83.312 ; 25.4,68.072 25.443,68.029 ; 32.385,95.377 32.766,95.377 ; 32.9,110.4 46.826,110.4 ; 44.069,36.634 50.35,36.634 50.673,36.957 50.673,40.767 51.435,41.529 60.833,41.529 61.214,41.91 61.214,48.768 ; 49.911,110.236 49.926,110.221 49.926,107.3 54.229,107.3 162.717,107.3 162.9,107.483 162.9,110.187 162.687,110.4 ; 57.912,95.758 57.912,90.932 58.039,90.805 137.16,90.805 137.922,91.567 137.922,95.504 137.922,101.727 ; 57.912,101.727 57.912,95.25 58.166,94.996 ; 61.214,48.46 61.214,65.024 61.214,66.548 60.579,67.183 31.115,67.183 31.115,99.06 33.782,101.727 150.495,101.727 151.003,102.235 151.003,103.886 ; 79.756,90.805 79.756,83.058 80.391,82.423 81.788,82.423 114.681,82.423 115.697,83.439 115.697,90.805 ; 143.129,25.4 143.256,25.527 ; 150.876,103.759 151.003,103.886 ; 151.003,107.3 151.003,103.886 ; 170.4,33.402 170.4,102.539
Power Plane (plane layer: these items are gaps in the copper):
  pour cut-out: 49.911,110.781 162.814,110.781 162.814,110.314 162.814,107.315 49.911,107.315
  lines w0.254: 25.35,70.485 25.399,70.435 ; 25.477,65.786 28.194,65.786 ; 25.633,36.648 44.323,36.648 50.254,36.648 50.8,37.194 50.8,37.338 ; 28.067,65.786 29.083,65.786 38.1,65.786 38.1,62.357 61.341,62.357 ; 30.988,97.028 30.988,98.806 33.782,101.6 ; 30.988,97.282 30.988,77.47 30.988,67.31 38.1,67.31 38.354,67.056 60.706,67.056 61.341,66.421 61.341,62.357 ; 33.836,101.6 148.463,101.6 151.003,104.14 151.003,107.315 ; 39.751,32.766 40.132,33.147 40.64,33.147 ; 54.229,25.527 54.356,25.4 ; 57.785,101.6 57.785,91.059 58.293,90.551 79.629,90.551 79.883,90.297 79.883,83.058 80.645,82.296 114.681,82.296 114.681,82.423 115.824,83.566 115.824,90.551 115.697,90.678 136.779,90.678 137.668,91.567 137.668,101.346 137.922,101.6 ; 61.214,41.529 61.341,41.656 61.341,48.641 ; 61.341,48.514 61.341,62.357 ; 65.532,52.197 65.532,52.832 65.532,59.719 65.791,59.978 68.961,59.978 113.826,59.978 ; 65.532,52.578 65.532,52.451 65.532,42.291 64.77,41.529 51.435,41.529 50.8,40.894 50.8,35.687 50.8,33.401 51.054,33.147 52.705,33.147 53.975,34.417 53.975,36.957 54.483,37.465 67.945,37.465 68.453,37.973 68.453,49.713 68.453,55.88 68.961,56.388 117.475,56.388 ; 113.846,59.998 120.704,59.998 ; 117.348,56.388 121.92,56.388 123.952,56.388 125.222,57.658 125.222,85.852 121.158,85.852 121.158,60.452 120.704,59.998 ; 120.65,59.998 120.704,59.998 ; 168.671,107.3 168.91,107.061 ; 170.18,32.766 170.4,32.986 170.4,102.9 ; 170.273,67.945 170.4,68.072
Multi-Layer:
  pour cut-out: 49.911,110.998 49.943,107.474 49.911,107.442 50.038,107.315 162.9,107.315 162.9,110.998
  pour cut-out: 49.911,110.871 49.974,110.807 49.974,107.379 162.9,107.379 162.9,110.871
  pour cut-out: 49.911,110.871 49.911,107.442 50.038,107.315 162.9,107.315 162.9,110.871

## Silkscreen, mask and mechanical layers (free items; w line width, h text height)
Top Overlay:
  lines w0.254: 55.4,30.369 140.4,30.369
  text "ML" at 165.608,44.323 h1.52 r90
  text "CR" at 154.686,43.561 h1.52 r90
Bottom Overlay:
  text "ANT" at 60.579,102.616 h1.52
  text "4A Max" at 51.943,49.657 h1.52
Top Solder:
  region: 42.462,41.741 43.278,42.557 42.919,42.916 42.102,42.1
  rectangle: 41.402,41.783 42.545,42.291
  rectangle: 42.926,42.418 43.561,42.926
  rectangle: 43.561,42.418 51.181,42.926
  rectangle: 40.386,48.26 41.021,49.53
  rectangle: 49.149,46.482 49.784,48.006
  rectangle: 43.561,48.387 48.641,48.895
  rectangle: 46.99,49.403 48.641,49.911
Bottom Solder:
  region: 45.339,44.704 51.813,51.178 51.496,51.496 45.022,45.021
  region: 56.516,50.928 60.069,54.481 59.689,54.86 56.136,51.307
  rectangle: 51.435,50.927 56.642,51.435
  rectangle: 44.45,44.577 45.466,45.212
  rectangle: 26.67,43.942 28.194,45.212
  rectangle: 57.912,59.055 58.928,60.452
Mechanical 13:
  circle w0.254: c47.9,104.4 r2.5
  circle w0.254: c97.9,104.4 r2.5
  circle w0.254: c147.9,104.4 r2.5
  circle w0.254: c147.9,31.4 r2.5
  circle w0.254: c47.9,31.4 r2.5
  circle w0.254: c97.9,31.4 r2.5
  circle w0.254: c31.4,67.9 r2.5

## Text inside footprints (layer, text, board x,y; h text height)
BT2: Top Overlay "-" at 51.816,51.181 h1.52 r180; Top Overlay "+" at 56.498,49.784 h1.52 r180
K1: Top Overlay "+" at 141.986,97.663 h1.52; Top Overlay "-" at 140.081,97.663 h1.52
K2: Top Overlay "+" at 54.574,97.546 h1.52; Top Overlay "-" at 52.669,97.546 h1.52
LS1: Top Overlay "-" at 145.669,37.211 h1.52 r180; Top Overlay "+" at 152.273,37.211 h1.52 r180
LS2: Top Overlay "+" at 160.02,93.726 h1.52 r90; Top Overlay "-" at 153.797,93.726 h1.52 r90
LS3: Top Overlay "+" at 43.688,93.726 h1.52 r90; Top Overlay "-" at 37.465,93.726 h1.52 r90
P2: Top Overlay "T" at 159.512,35.433 h1.27 r90
P3: Top Overlay "T" at 167.259,35.56 h1.27 r90
P4: Top Overlay "1" at 54.483,28.575 h1.27; Top Overlay "2" at 53.975,31.115 h1.27; Top Overlay "4" at 60.833,31.115 h1.27; Top Overlay "3" at 60.833,28.575 h1.27
P5: Top Overlay "1" at 134.62,28.575 h1.27; Top Overlay "2" at 134.366,31.115 h1.27; Top Overlay "4" at 140.97,31.115 h1.27; Top Overlay "3" at 140.97,28.321 h1.27
P7: Top Overlay "1" at 174.625,108.839 h1.27 r270; Top Overlay "2" at 181.737,108.966 h1.27 r270; Top Overlay "4" at 179.705,104.14 h1.27 r270; Top Overlay "3" at 176.911,104.14 h1.27 r270
P8: Top Overlay "1" at 176.657,32.131 h1.27 r270; Top Overlay "2" at 179.705,32.258 h1.27 r270; Top Overlay "4" at 181.864,27.305 h1.27 r270; Top Overlay "3" at 174.625,27.178 h1.27 r270
P10: Bottom Overlay "17" at 165.989,63.5 h1 r90; Bottom Overlay "1" at 165.989,77.851 h1 r90
Q1: Bottom Overlay "B" at 150.604,42.611 h0.5 r270; Bottom Overlay "E" at 150.604,44.135 h0.5 r270; Bottom Overlay "C" at 150.604,43.373 h0.5 r270
Q2: Bottom Overlay "G" at 83.185,71.628 h0.5; Bottom Overlay "S" at 81.661,71.628 h0.5; Bottom Overlay "D" at 82.423,71.628 h0.5
Q3: Bottom Overlay "C" at 167.132,92.22 h0.5; Bottom Overlay "E" at 166.37,92.22 h0.5; Bottom Overlay "B" at 167.894,92.22 h0.5
Q4: Bottom Overlay "D" at 162.814,94.361 h0.5 r90; Bottom Overlay "S" at 162.814,93.599 h0.5 r90; Bottom Overlay "G" at 162.814,95.123 h0.5 r90
Q5: Bottom Overlay "B" at 118.069,77.724 h0.5; Bottom Overlay "E" at 116.545,77.724 h0.5; Bottom Overlay "C" at 117.307,77.724 h0.5
Q6: Bottom Overlay "C" at 98.161,77.978 h0.5; Bottom Overlay "E" at 97.399,77.978 h0.5; Bottom Overlay "B" at 98.923,77.978 h0.5
Q7: Bottom Overlay "G" at 122.25,77.978 h0.5 r180; Bottom Overlay "S" at 123.774,77.978 h0.5 r180; Bottom Overlay "D" at 123.012,77.978 h0.5 r180
Q8: Bottom Overlay "D" at 106.914,77.978 h0.5 r180; Bottom Overlay "S" at 107.676,77.978 h0.5 r180; Bottom Overlay "G" at 106.152,77.978 h0.5 r180
Q9: Bottom Overlay "B" at 129.667,77.851 h0.5; Bottom Overlay "E" at 128.143,77.851 h0.5; Bottom Overlay "C" at 128.905,77.851 h0.5
Q10: Bottom Overlay "C" at 89.027,78.105 h0.5; Bottom Overlay "E" at 88.265,78.105 h0.5; Bottom Overlay "B" at 89.789,78.105 h0.5
Q11: Bottom Overlay "G" at 112.999,77.724 h0.5; Bottom Overlay "S" at 111.475,77.724 h0.5; Bottom Overlay "D" at 112.237,77.724 h0.5
Q12: Bottom Overlay "D" at 67.564,50.038 h0.5; Bottom Overlay "S" at 66.802,50.038 h0.5; Bottom Overlay "G" at 68.326,50.038 h0.5
Q13: Bottom Overlay "C" at 72.583,49.893 h0.5; Bottom Overlay "E" at 71.821,49.893 h0.5; Bottom Overlay "B" at 73.345,49.893 h0.5
Q14: Top Overlay "G" at 48.768,66.548 h0.5; Top Overlay "S" at 50.292,66.548 h0.5; Top Overlay "D" at 49.53,66.548 h0.5
Q16: Top Overlay "D" at 54.737,44.958 h0.5; Top Overlay "S" at 55.499,44.958 h0.5; Top Overlay "G" at 53.975,44.958 h0.5
Q17: Top Overlay "G" at 53.975,39.878 h0.5; Top Overlay "S" at 55.499,39.878 h0.5; Top Overlay "D" at 54.737,39.878 h0.5
Q18: Bottom Overlay "D" at 131.445,98.044 h0.5 r90; Bottom Overlay "S" at 131.445,97.282 h0.5 r90; Bottom Overlay "G" at 131.445,98.806 h0.5 r90
Q19: Bottom Overlay "G" at 163.322,59.055 h0.5 r180; Bottom Overlay "S" at 164.846,59.055 h0.5 r180; Bottom Overlay "D" at 164.084,59.055 h0.5 r180
Q20: Top Overlay "B" at 184.721,98.044 h0.5 r180; Top Overlay "E" at 183.197,98.044 h0.5 r180; Top Overlay "C" at 183.959,98.044 h0.5 r180
Q21: Top Overlay "C" at 183.07,37.338 h0.5; Top Overlay "E" at 183.832,37.338 h0.5; Top Overlay "B" at 182.308,37.338 h0.5
Q22: Top Overlay "B" at 180.086,98.044 h0.5 r180; Top Overlay "E" at 178.562,98.044 h0.5 r180; Top Overlay "C" at 179.324,98.044 h0.5 r180
Q23: Top Overlay "C" at 178.308,37.338 h0.5; Top Overlay "E" at 179.07,37.338 h0.5; Top Overlay "B" at 177.546,37.338 h0.5
Q24: Top Overlay "B" at 187.071,37.338 h0.5; Top Overlay "E" at 188.595,37.338 h0.5; Top Overlay "C" at 187.833,37.338 h0.5
Q25: Top Overlay "C" at 188.595,98.044 h0.5 r180; Top Overlay "E" at 187.833,98.044 h0.5 r180; Top Overlay "B" at 189.357,98.044 h0.5 r180
U14: Top Overlay "C" at 29.845,93.853 h1.3
U15: Top Overlay "IO" at 22.987,41.656 h0.5; Top Overlay "D+" at 22.987,42.291 h0.5; Top Overlay "D-" at 22.987,42.926 h0.5; Top Overlay "GND" at 22.606,40.894 h0.5; Top Overlay "VBUS" at 22.225,43.561 h0.5
U19: Top Overlay "4" at 45.212,29.21 h1.27; Top Overlay "3" at 45.339,26.797 h1.27; Top Overlay "6" at 35.941,29.21 h1.27; Top Overlay "1" at 36.322,26.67 h1.27
U20: Top Overlay "4" at 150.749,27.686 h1.27 r180; Top Overlay "3" at 150.749,30.353 h1.27 r180; Top Overlay "6" at 160.147,27.686 h1.27 r180; Top Overlay "1" at 160.02,30.226 h1.27 r180
U23: Top Overlay "VBUS" at 31.757,61.307 h1.52 r180; Top Overlay "D-" at 31.757,58.767 h1.52 r180; Top Overlay "D+" at 31.757,56.481 h1.52 r180; Top Overlay "GND" at 31.63,54.195 h1.52 r180
U32: Bottom Overlay "+" at 159.639,66.675 h1.52; Bottom Overlay "-" at 141.859,66.675 h1.52
U38: Top Overlay "P" at 179.197,83.947 h1 r270; Top Overlay "E" at 179.197,89.662 h1 r270; Top Overlay "+" at 179.07,86.868 h1 r270; Top Overlay "+" at 183.642,86.868 h1 r270; Top Overlay "F" at 183.515,89.662 h1 r270; Top Overlay "B" at 183.515,83.82 h1 r270; Top Overlay "A" at 182.118,83.947 h1 r270; Top Overlay "C" at 180.721,83.82 h1 r270; Top Overlay "G" at 182.118,89.662 h1 r270; Top Overlay "D" at 180.721,89.662 h1 r270
U39: Top Overlay "D" at 180.721,82.144 h1 r270; Top Overlay "G" at 182.118,82.144 h1 r270; Top Overlay "C" at 180.721,76.302 h1 r270; Top Overlay "A" at 182.118,76.429 h1 r270; Top Overlay "B" at 183.515,76.302 h1 r270; Top Overlay "F" at 183.515,82.144 h1 r270; Top Overlay "+" at 183.642,79.35 h1 r270; Top Overlay "+" at 179.07,79.35 h1 r270; Top Overlay "E" at 179.197,82.144 h1 r270; Top Overlay "P" at 179.197,76.429 h1 r270
U40: Top Overlay "P" at 179.197,61.392 h1 r270; Top Overlay "E" at 179.197,67.107 h1 r270; Top Overlay "+" at 179.07,64.313 h1 r270; Top Overlay "+" at 183.642,64.313 h1 r270; Top Overlay "F" at 183.515,67.107 h1 r270; Top Overlay "B" at 183.515,61.265 h1 r270; Top Overlay "A" at 182.118,61.392 h1 r270; Top Overlay "C" at 180.721,61.265 h1 r270; Top Overlay "G" at 182.118,67.107 h1 r270; Top Overlay "D" at 180.721,67.107 h1 r270
U41: Top Overlay "D" at 180.721,52.07 h1 r270; Top Overlay "G" at 182.118,52.07 h1 r270; Top Overlay "C" at 180.721,46.228 h1 r270; Top Overlay "A" at 182.118,46.355 h1 r270; Top Overlay "B" at 183.515,46.228 h1 r270; Top Overlay "F" at 183.515,52.07 h1 r270; Top Overlay "+" at 183.642,49.276 h1 r270; Top Overlay "+" at 179.07,49.276 h1 r270; Top Overlay "E" at 179.197,52.07 h1 r270; Top Overlay "P" at 179.197,46.355 h1 r270
U42: Top Overlay "P" at 184.531,73.99 h1 r90; Top Overlay "E" at 184.531,68.275 h1 r90; Top Overlay "+" at 184.658,71.069 h1 r90; Top Overlay "+" at 180.086,71.069 h1 r90; Top Overlay "F" at 180.213,68.275 h1 r90; Top Overlay "B" at 180.213,74.117 h1 r90; Top Overlay "A" at 181.61,73.99 h1 r90; Top Overlay "C" at 183.007,74.117 h1 r90; Top Overlay "G" at 181.61,68.275 h1 r90; Top Overlay "D" at 183.007,68.275 h1 r90
U43: Top Overlay "D" at 183.007,53.238 h1 r90; Top Overlay "G" at 181.61,53.238 h1 r90; Top Overlay "C" at 183.007,59.08 h1 r90; Top Overlay "A" at 181.61,58.953 h1 r90; Top Overlay "B" at 180.213,59.08 h1 r90; Top Overlay "F" at 180.213,53.238 h1 r90; Top Overlay "+" at 180.086,56.032 h1 r90; Top Overlay "+" at 184.658,56.032 h1 r90; Top Overlay "E" at 184.531,53.238 h1 r90; Top Overlay "P" at 184.531,58.953 h1 r90